# EAGLE board kicker2 (EAGLE 4.16)
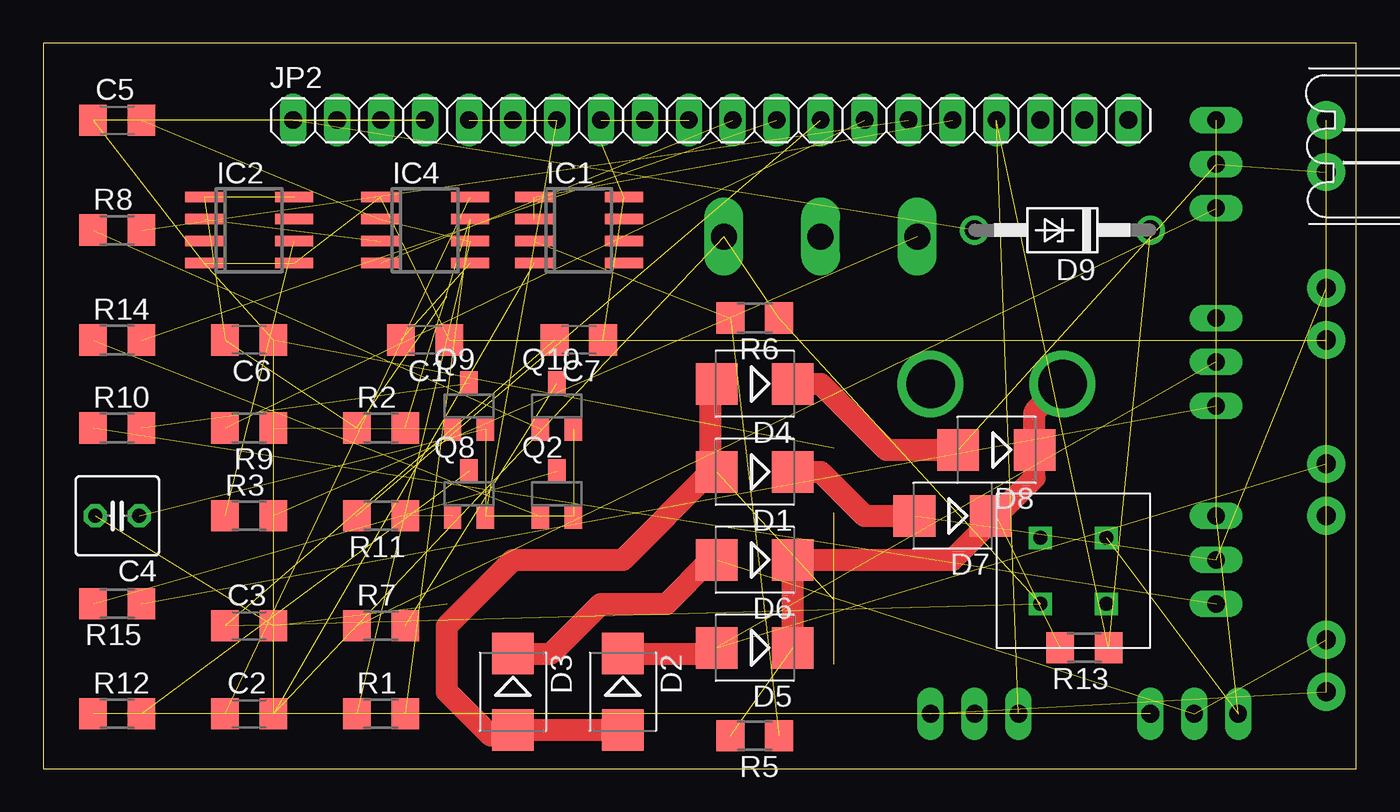
[diagram p0: board, top side]
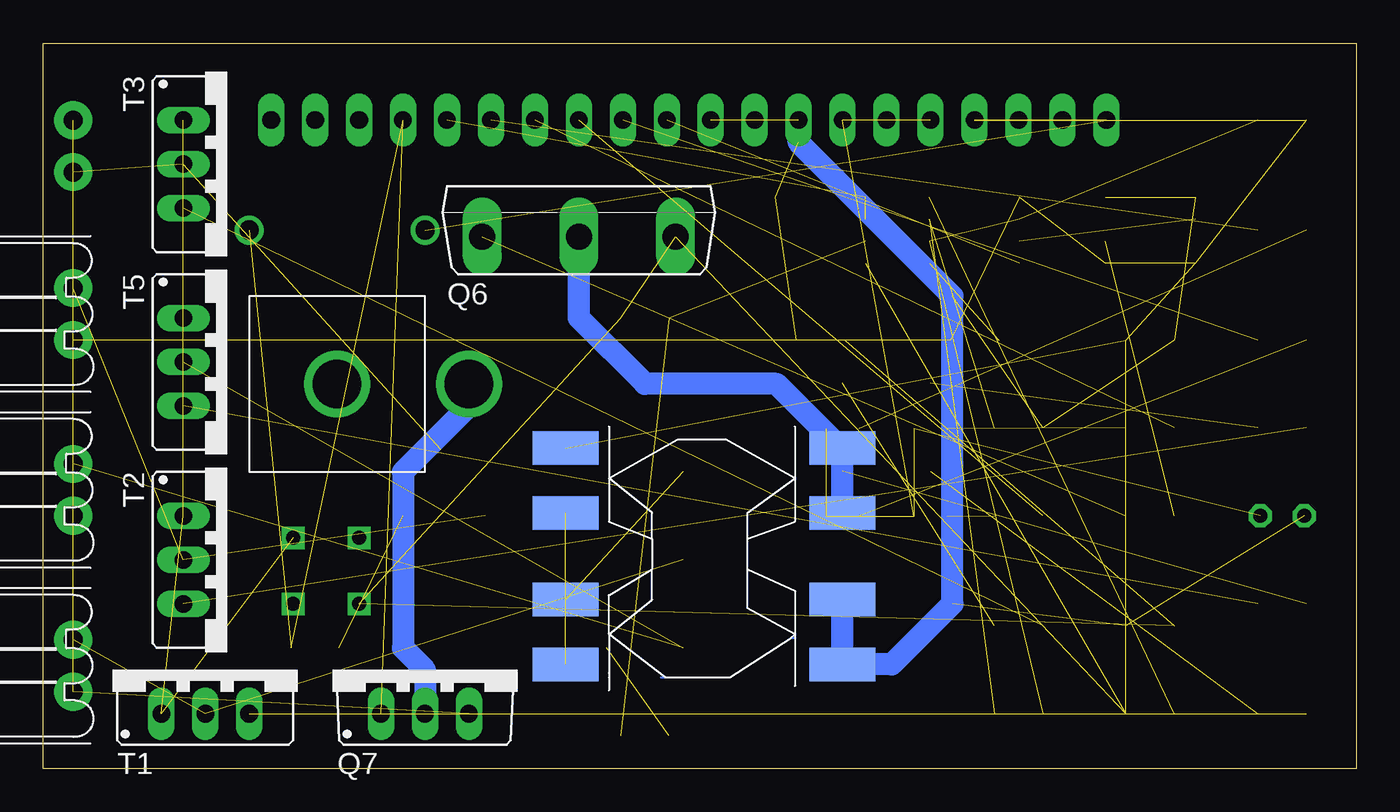
[diagram p1: board, bottom side, seen from below]

Size 75.87 x 41.9 mm. Coordinates in mm from the lower left corner, seen from the top.
Outline: 0,0 75.87,0 75.87,41.9 0,41.9 0,0
Copper layers (1*16): Top 0.035mm / dielectric 1.5mm / Bottom 0.035mm
Design rules "default": minimum track width 10mil, minimum drill 24mil, track to track 8mil, track to pad 8mil, pad to pad 8mil, via to via 8mil, smd to smd 8mil, copper to edge 40mil, drill to drill 8mil, minimum pad ring 10mil, minimum via ring 8mil, stop-mask expansion 4mil, vias tented up to drill 0mil, thermal gap 10mil

## Footprints (pad centres in the part's own frame; a part is rotated, then mirrored left to right if it is on the bottom)
C1206 = smd 1.6 x 1.8: 1 -1.4,0; 2 1.4,0
C025-050X050 = drill 0.813 octagon: 1 -1.27,0; 2 1.27,0
SMB = smd 2.4 x 2.4: A 2.2,0; C -2.2,0
DO41Z10 = drill 1.118 round: A 5.08,0; C -5.08,0
SO08 = smd 0.6 x 2.2: 1 -1.905,-2.6; 2 -0.635,-2.6; 3 0.635,-2.6; 4 1.905,-2.6; 5 1.905,2.6; 6 0.635,2.6; 7 -0.635,2.6; 8 -1.905,2.6
SO-08 = smd 0.6 x 2.2: 1 -1.905,-2.6; 2 -0.635,-2.6; 3 0.635,-2.6; 4 1.905,-2.6; 5 1.905,2.6; 6 0.635,2.6; 7 -0.635,2.6; 8 -1.905,2.6
1X20 = drill 1.016 long: 1 -24.13,0; 2 -21.59,0; 3 -19.05,0; 4 -16.51,0; 5 -13.97,0; 6 -11.43,0; 7 -8.89,0; 8 -6.35,0; 9 -3.81,0; 10 -1.27,0; 11 1.27,0; 12 3.81,0; 13 6.35,0; 14 8.89,0; 15 11.43,0; 16 13.97,0; 17 16.51,0; 18 19.05,0; 19 21.59,0; 20 24.13,0
SOT23W = smd 1 x 1.4: 1 -0.95,-1.303; 2 0.95,-1.303; 3 0,1.303
TO247BV = drill 1.499 long: D 0,-2.921; G -5.588,-2.921; S 5.588,-2.921
TO220BV = drill 1.016 long: D 0,-2.54; G -2.54,-2.54; S 2.54,-2.54
R1206 = smd 1.6 x 1.8: 1 -1.4,0; 2 1.4,0
TO220CS = drill 1.016 long: A 0,-2.54; C -2.54,-2.54; G 2.54,-2.54
SM = smd 3.81 x 1.93: 1 0.5,-3.5; 2 0.5,0.25; 3 0.5,5.25; 4 0.5,9; 5 16.5,9; 6 16.5,5.25; 7 16.5,0.25; 8 16.5,-3.5
2007 = drill 1.1 pad 2.184 round: P$1 0,0; P$2 3,0
RESISTOR = drill 2.8 round: P$1 -2.54,0; P$2 5.08,0
CONNECT = drill 0.8 square: P$1 2.54,2.54; P$2 6.35,2.54; P$3 6.35,6.35; P$4 2.54,6.35

## Placement (x,y rotation side)
C1  0.1 uF  [C1206]  22.06,24.76 180 top
C2  0.1 uF  [C1206]  11.9,3.17 0 top
C3  0.1 uF  [C1206]  11.9,8.25 0 top
C4  100uF  [C025-050X050]  4.28,14.6 180 top
C5  1000 pF  [C1206]  4.28,37.46 0 top
C6  0.1 uF  [C1206]  11.9,24.76 180 top
C7  0.1 uF  [C1206]  30.95,24.76 180 top
D1  ES2D  [SMB]  41.11,17.14 180 top
D2  ES2D  [SMB]  33.49,4.44 270 top
D3  ES2D  [SMB]  27.14,4.44 270 top
D4  ES2D  [SMB]  41.11,22.22 180 top
D5  ES2D  [SMB]  41.11,6.98 180 top
D6  ES2D  [SMB]  41.11,12.06 180 top
D7  ES2D  [SMB]  52.54,14.6 180 top
D8  ES2D  [SMB]  55.08,18.41 180 top
D9  1N4728  [DO41Z10]  58.89,31.11 180 top
IC1  OPA2345U  [SO08]  30.95,31.11 270 top
IC2  MIC4420M  [SO-08]  11.9,31.11 270 top
IC4  TLC555CP  [SO08]  22.06,31.11 270 top
JP2  [1X20]  38.57,37.46 0 top
Q2  [SOT23W]  29.68,15.87 0 top
Q6  RFP250  [TO247BV]  44.92,33.65 0 bottom
Q7  SUP75n06-08  [TO220BV]  53.81,5.71 0 bottom
Q8  [SOT23W]  24.6,15.87 0 top
Q9  [SOT23W]  24.6,20.95 0 top
Q10  [SOT23W]  29.68,20.95 0 top
R1  2.2K  [R1206]  19.52,3.17 0 top
R2  390  [R1206]  19.52,19.68 0 top
R3  5  [R1206]  11.9,14.6 0 top
R5  250K  [R1206]  41.11,1.9 180 top
R6  2.8K  [R1206]  41.11,26.03 180 top
R7  50  [R1206]  19.52,8.25 0 top
R8  1K  [R1206]  4.28,31.11 0 top
R9  1K  [R1206]  11.9,19.68 180 top
R10  50  [R1206]  4.28,19.68 0 top
R11  1K  [R1206]  19.52,14.6 180 top
R12  50  [R1206]  4.28,3.17 0 top
R13  250K  [R1206]  60.16,6.98 180 top
R14  1K  [R1206]  4.28,24.76 0 top
R15  50  [R1206]  4.28,9.52 180 top
T1  S6025L  [TO220CS]  66.51,5.71 0 bottom
T2  S6025L  [TO220CS]  65.24,12.06 270 bottom
T3  S6025L  [TO220CS]  65.24,34.92 270 bottom
T5  S6025L  [TO220CS]  65.24,23.49 270 bottom
U$1  A0009-AL  [SM]  46.19,9.52 0 bottom
U$2  2PINHEADER  [2007]  74.13,14.6 90 bottom
U$3  2PINHEADER  [2007]  74.13,4.44 90 bottom
U$4  2PINHEADER  [2007]  74.13,37.46 270 top
U$5  2PINHEADER  [2007]  74.13,24.76 90 bottom
U$7  RESISTOR  [RESISTOR]  53.81,22.22 180 bottom
U$8  CONNECT  [CONNECT]  55.08,6.98 0 top

## Library data of the parts
C1-C7 R1-R3 R5-R15 = rcl
D1-D9 = diode
IC1 IC4 = linear
IC2 Q6 Q7 = transistor-power
JP2 = pinhead
Q2 Q8-Q10 = semicon-smd-ipc
T1-T3 T5 = triac
U$1 = Kicker
U$2-U$5 U$7 = kickerHeader
U$8 = 19inch

## Nets
+5V: C4.1 JP2.5 JP2.6 JP2.7 Q2.2 Q8.2 Q9.2 Q10.2
+12V: C3.2 C4.2 C6.2 C7.1 IC1.8 IC2.1 IC2.8 JP2.8 JP2.9 JP2.10 R2.1 U$1.7 U$1.8
CHARGESHUTOFF: IC4.4 JP2.11
N$1: Q6.G R3.2
N$2: U$1.1 U$1.3
N$3: JP2.12 R14.2
N$4: IC2.6 R3.1
N$5: Q6.D U$1.5 U$1.6
N$6: D1.A D2.A D3.A D4.A U$1.2
N$7: D2.C D5.A T5.A U$2.P$2
N$8: D3.C D6.A T1.A U$3.P$2
N$9: D1.C D7.A T2.A U$5.P$2
N$10: D4.C D8.A T3.A U$4.P$2
N$11: D5.C D6.C D7.C D8.C R5.2 R13.2 U$7.P$2
N$12: Q7.D U$7.P$1
N$13: R7.1 T3.G
N$14: JP2.13 R11.2
N$16: IC1.1 IC1.2 JP2.16
N$17: IC4.7 R1.2 R2.2
N$18: C1.2 IC4.5
N$19: C2.1 IC4.8
N$20: JP2.15 R8.2
N$21: C5.2 IC4.2 IC4.6 R1.1
N$22: JP2.14 R9.2
N$23: IC1.3 R5.1 R6.2
N$24: IC2.2 IC4.3
N$25: Q2.1 R14.1
N$26: Q2.3 R15.2
N$27: Q9.1 R9.1
N$28: Q9.3 R10.2
N$29: T1.C T2.C T3.C T5.C U$8.P$3
N$30: Q8.1 R11.1
N$31: Q10.3 R7.2
N$32: R12.1 T1.G
N$33: Q8.3 R12.2
N$34: Q10.1 R8.1
N$35: R10.1 T2.G
N$36: R15.1 T5.G
N$38: D9.C JP2.17 Q7.G R13.1
PE: C1.1 C2.2 C3.1 C5.1 C6.1 C7.2 D9.A IC1.4 IC2.4 IC2.5 IC4.1 JP2.1 JP2.2 JP2.3 JP2.4 Q6.S Q7.S R6.1 U$1.4 U$2.P$1 U$3.P$1 U$4.P$1 U$5.P$1 U$8.P$1

## Tracks (layer width: path | path; a pad name or v marks a point on that pad's centre or on a via)
+5V  (7 unrouted)
+12V  (10 unrouted)
  Bottom 1.27: U$1.7 29.69,9.53 29.68,9.52 29.69,9.51 U$1.8 26.83,6.02 23.33,9.52 23.33,27.3 32.22,36.19 JP2.8
CHARGESHUTOFF  (1 unrouted)
N$1  (1 unrouted)
N$2  (1 unrouted)
N$3  (1 unrouted)
N$4  (1 unrouted)
N$5
  Bottom 1.27: U$1.6 29.69,14.61 | 29.69,14.61 U$1.5 29.69,18.42 | 29.69,14.61 29.68,14.6 | Q6.D 44.92,26.03 41.11,22.22 33.49,22.22 29.69,18.42 | 29.69,18.42 29.68,18.41
N$6  (1 unrouted)
  Top 1.27: D2.A D3.A 27.14,1.9 25.87,1.9 23.33,4.44 23.33,8.25 27.14,12.06 33.49,12.06 38.57,17.14 | D4.A 38.57,22.22 38.57,17.14 | 38.57,17.14 D1.A
N$7  (2 unrouted)
  Top 1.27: D5.A 38.57,6.98 38.23,6.64 D2.C
N$8  (2 unrouted)
  Top 1.27: D3.C 29.34,6.64 32.22,9.52 36.03,9.52 38.57,12.06 D6.A
N$9  (2 unrouted)
  Top 1.27: D1.C 44.92,17.14 47.46,14.6 D7.A
N$10  (2 unrouted)
  Top 1.27: D4.C 44.92,22.22 48.73,18.41 D8.A
N$11  (2 unrouted)
  Top 1.27: 43.65,12.06 D6.C | D5.C 43.31,11.72 43.65,12.06 | 55.08,14.6 57.28,16.8 D8.C 57.28,20.61 U$7.P$2 | 55.08,14.6 D7.C | 43.65,12.06 52.54,12.06 55.08,14.6
N$12
  Bottom 1.27: U$7.P$1 51.27,20.95 55.08,17.14 55.08,6.98 53.81,5.71 Q7.D
N$13  (1 unrouted)
N$14  (1 unrouted)
N$16  (2 unrouted)
N$17  (2 unrouted)
N$18  (1 unrouted)
N$19  (1 unrouted)
N$20  (1 unrouted)
N$21  (3 unrouted)
N$22  (1 unrouted)
N$23  (2 unrouted)
N$24  (1 unrouted)
N$25  (1 unrouted)
N$26  (1 unrouted)
N$27  (1 unrouted)
N$28  (1 unrouted)
N$29  (4 unrouted)
N$30  (1 unrouted)
N$31  (1 unrouted)
N$32  (1 unrouted)
N$33  (1 unrouted)
N$34  (1 unrouted)
N$35  (1 unrouted)
N$36  (1 unrouted)
N$38  (3 unrouted)
PE  (23 unrouted)